# Altium PCB final_modue.PcbDoc
Units mm, origin at the board's own origin, x right, y up, seen from the top; angles counter-clockwise.
Board outline 64.39 x 68.71 mm, 3 copper layers (Top Layer, Mid-Layer 3, Bottom Layer); 23 components, 22 nets, 113 pads, 76 vias.
Unrouted connection lines stored in the file: 1.
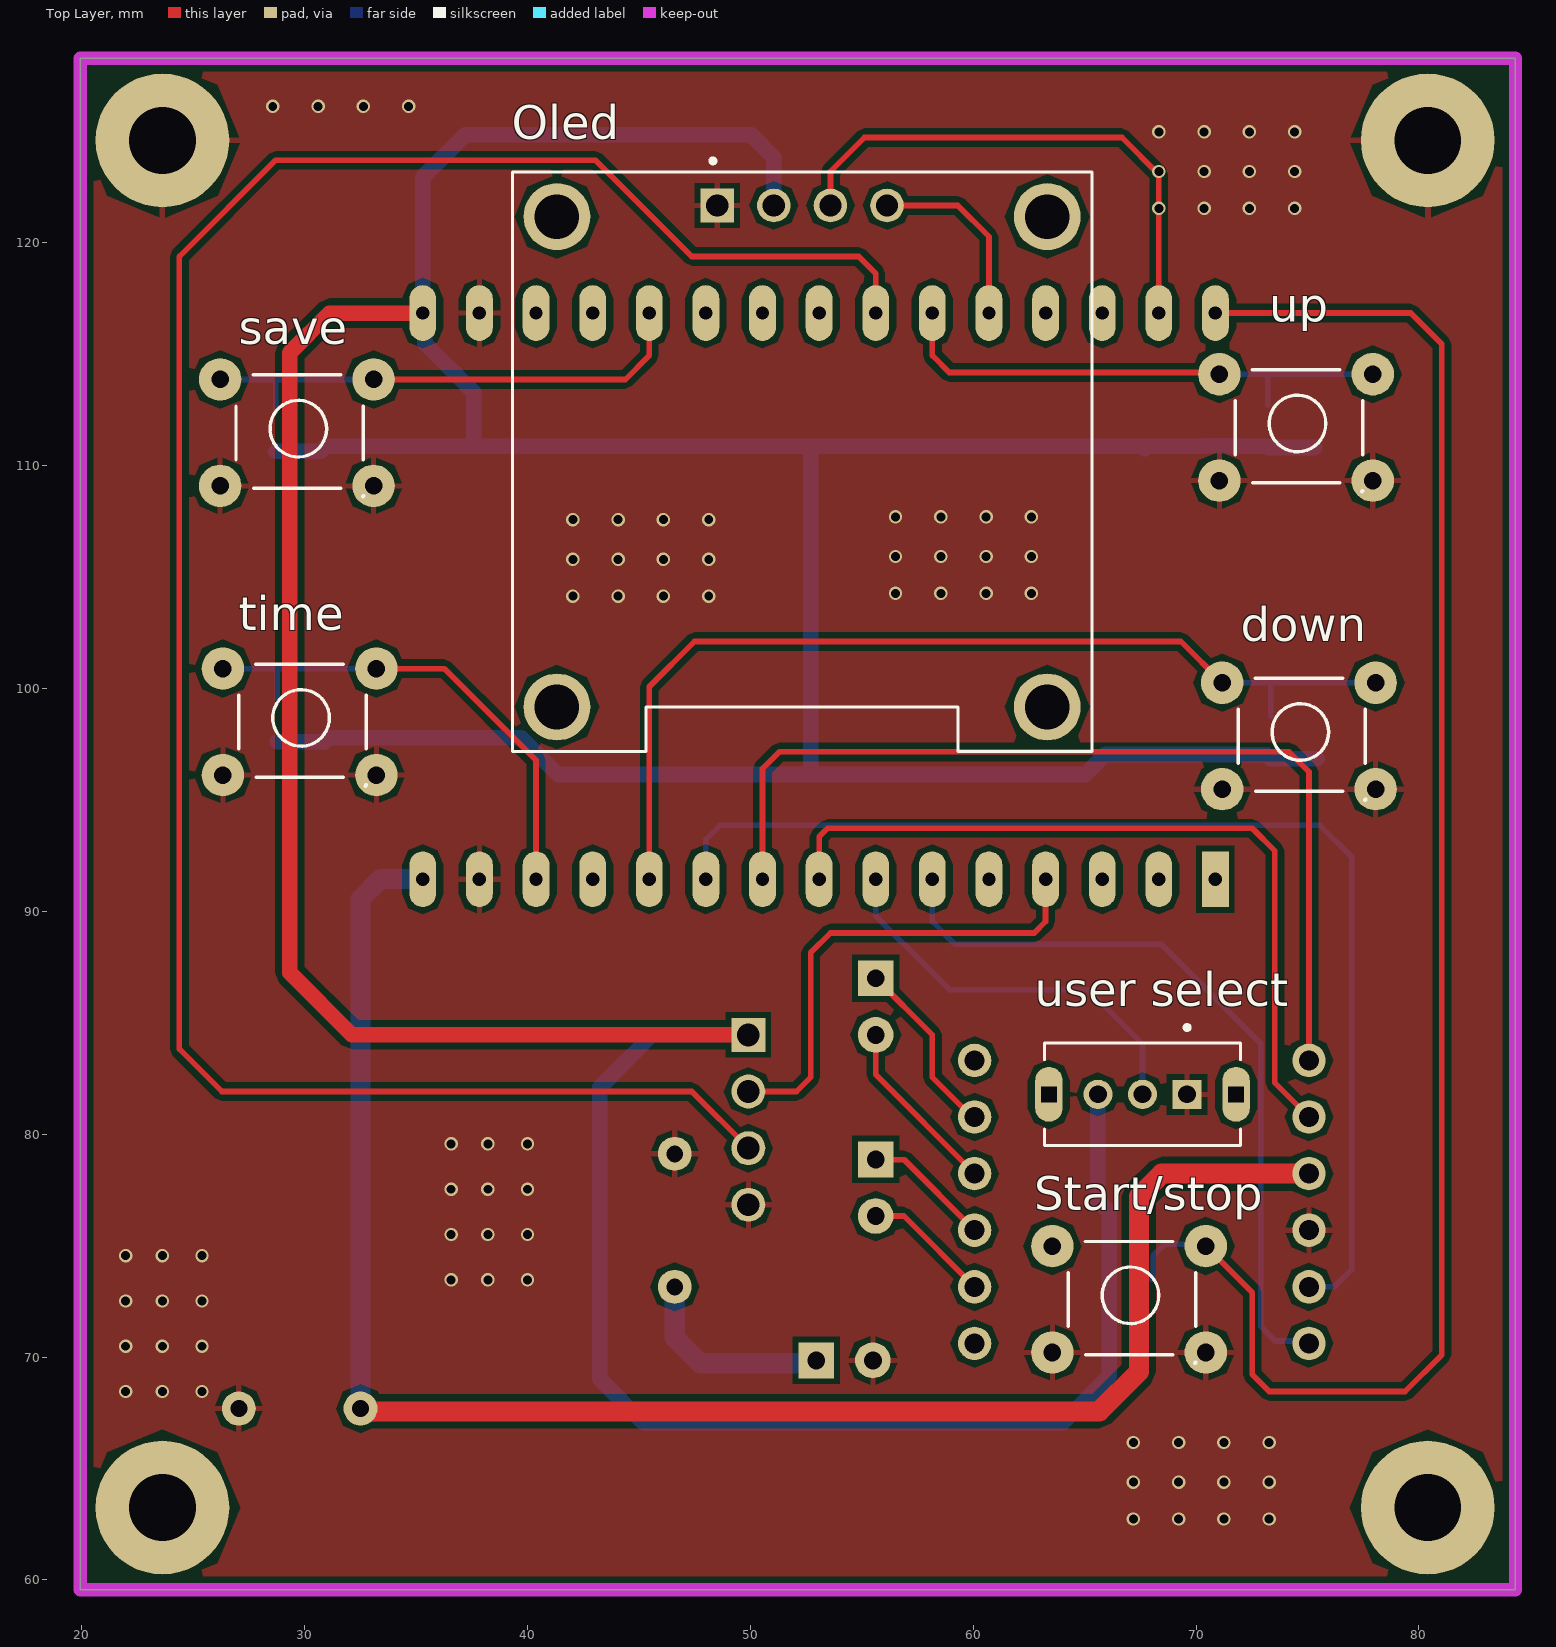
[diagram p0: Top Layer view]
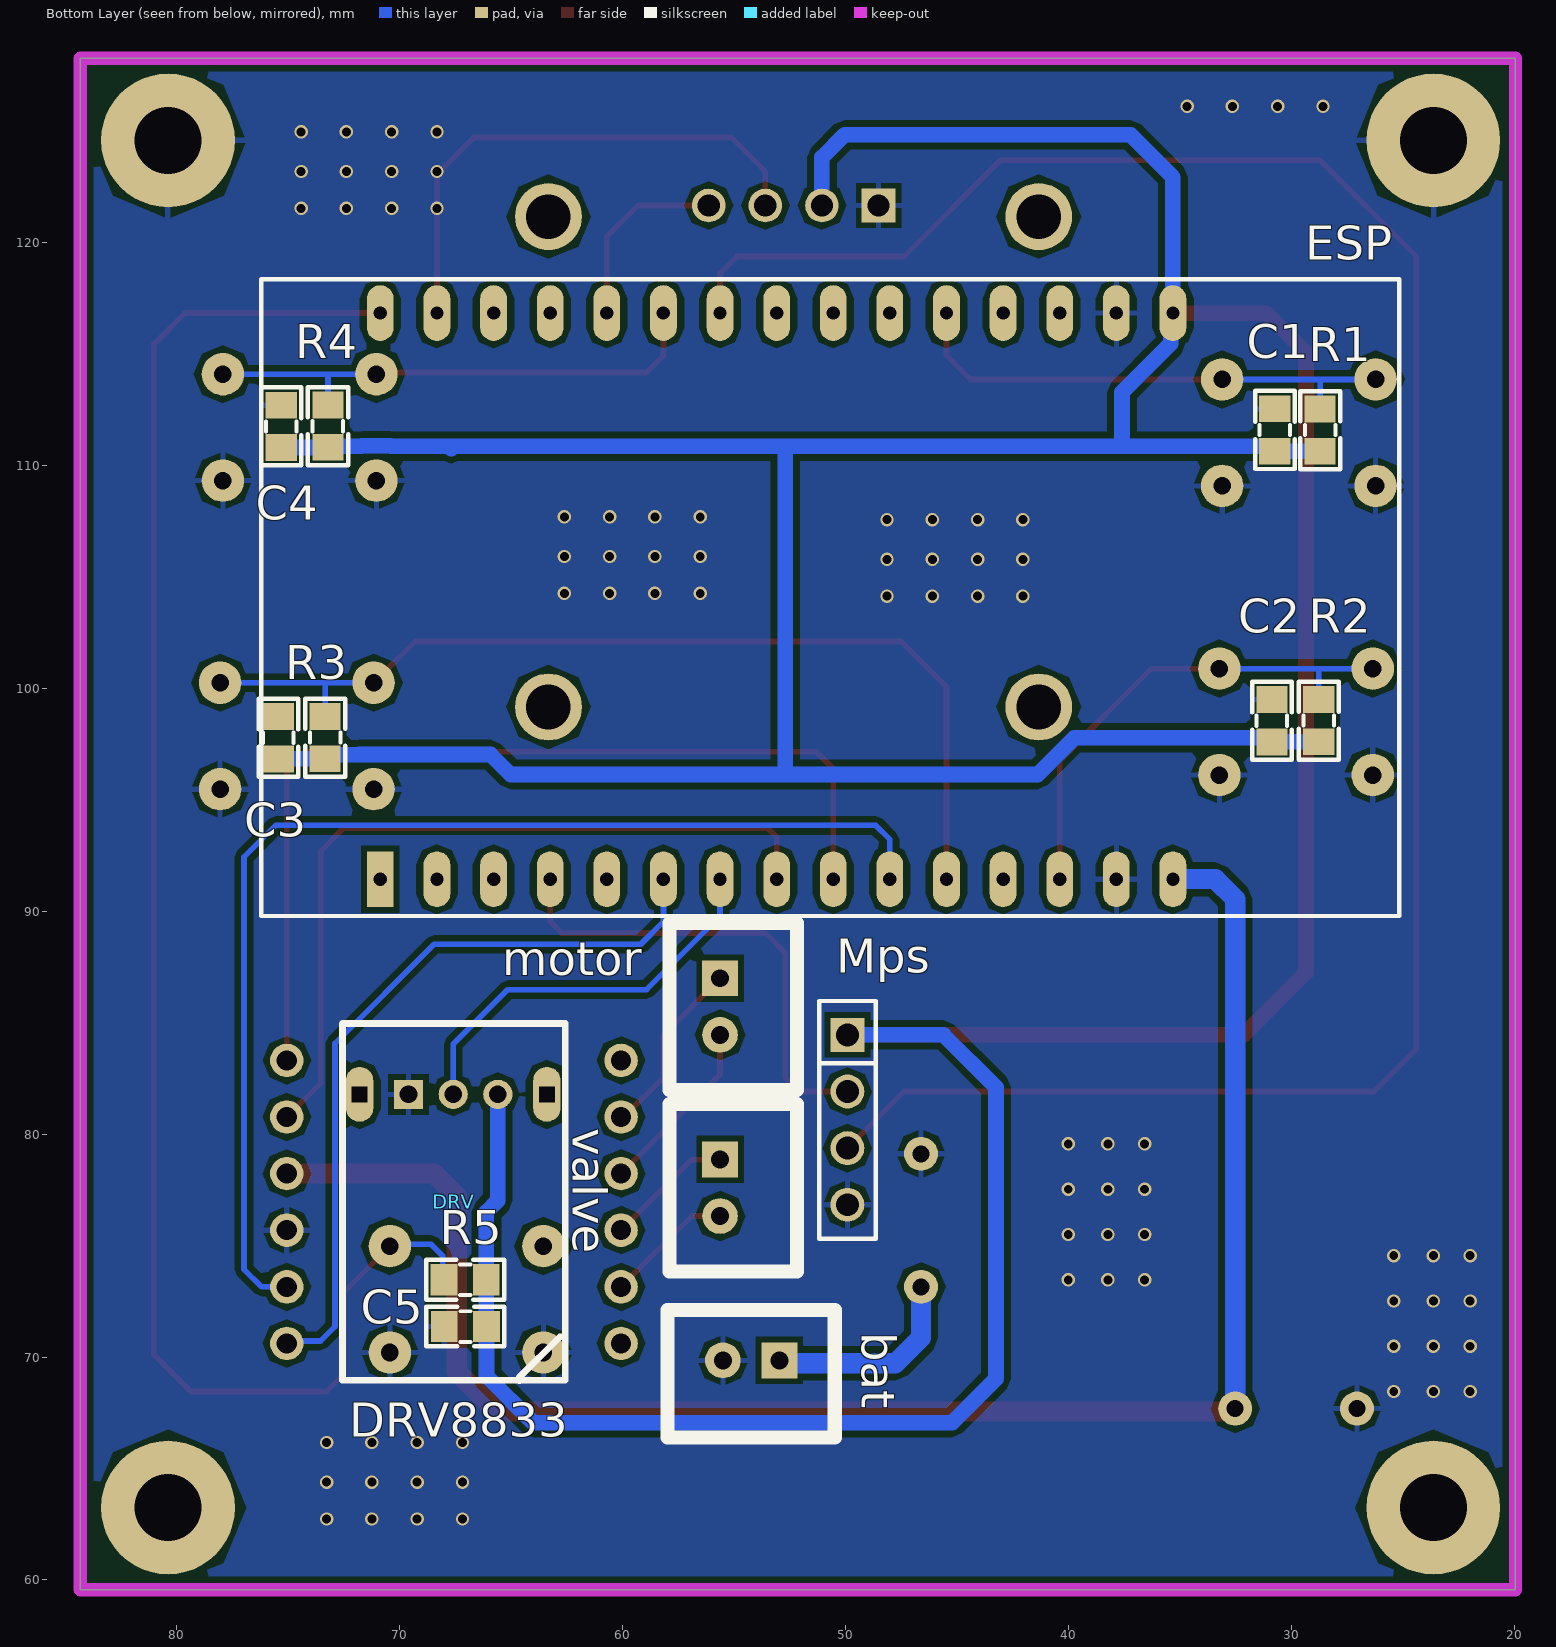
[diagram p1: Bottom Layer view, seen from below]

## Layer stack, top to bottom
Top Solder: solder mask 0.0102, Solder Resist, Dk 3.5
Top Layer: signal copper 0.0356
Dielectric 1: dielectric 0.32, FR-4, Dk 4.8
Mid-Layer 3: signal copper 0.0356
Dielectric2: dielectric 0.32, FR-4, Dk 4.8
Bottom Layer: signal copper 0.0356
Bottom Solder: solder mask 0.0102, Solder Resist, Dk 3.5

## Board outline
19.939,59.563 19.939,128.27 84.328,128.27 84.328,59.563

## Design rules (kind name [scope] priority, off if disabled: settings)
Clearance [All] p1: gap=0.254 ignorepadtopadclearanceinfootprint=FALSE except(0: Arc-Hole Track-Hole SMDPad-Hole THPad-Hole Via-Hole Fill-Hole Poly-Hole Region-Hole Text-Hole)
PolygonConnect [All] p1: connectstyle=Relief reliefconductorwidth=0.254 reliefentries=4 polygonreliefangle="90 Angle" airgapwidth=0.254
RoutingVias [All] p1: holewidth=0.711 width=1.27 viastyle="Through Hole" minholewidth=0.711 minwidth=1.27 maxholewidth=0.711 maxwidth=1.27
SolderMaskExpansion [All] p1: expansion=0.102
Width [All] p1: maxlimit=1 minlimit=0.254 preferedwidth=0.7
30 further rules are at their usual default settings.

## Components (designator, comment, footprint, x,y, rotation, side; value= is the part's Value field where it differs from the comment)
bat "Header 2P 2.54 Duc Thang" XH2.54M-2 52.959,69.85 r0 bottom (schematic designator Pin)
C1 "104" "tu 0805" 30.731,111.596 r270 bottom
C2 "104" "tu 0805" 30.861,98.552 r270 bottom
C3 "104" "tu 0805" 75.438,97.79 r270 bottom
C4 "104" "tu 0805" 75.311,111.76 r270 bottom
C5 "104" "tu 0805" 67.056,71.374 r180 bottom
down "Nut Nhan 4 Chan Cam 6x6" "Nut Nhan 4 Chan Cam 6x6" 71.501,100.457 r0 top (schematic designator BT3)
DRV "DRV8833" DRV8833 67.564,76.962 r90 bottom
ESP "ESP32 DEVKIT" "ESP32 WROOM 32 KIT" 70.866,91.44 r90 bottom
motor "motor" XH2.54M-2 55.626,86.995 r270 bottom
Mps "MPS" "JP 1x4 CT" 49.911,84.455 r270 bottom
Oled "DM-OLED096-636" MODULE_DM-OLED096-636 52.324,110.166 r0 top
R1 "10k" "tro smd 0805" 28.764,111.582 r90 bottom
R2 "10k" "tro smd 0805" 28.829,98.552 r90 bottom
R3 "10k" "tro smd 0805" 73.406,97.79 r90 bottom
R4 "10k" "tro smd 0805" 73.279,111.76 r90 bottom
R5 "10k" "tro smd 0805" 67.056,73.406 r0 bottom
save "Nut Nhan 4 Chan Cam 6x6" "Nut Nhan 4 Chan Cam 6x6" 26.544,114.066 r0 top (schematic designator BT1)
Start/stop "Nut Nhan 4 Chan Cam 6x6" "Nut Nhan 4 Chan Cam 6x6" 63.881,75.184 r0 top (schematic designator BT5)
time "Nut Nhan 4 Chan Cam 6x6" "Nut Nhan 4 Chan Cam 6x6" 26.67,101.092 r0 top (schematic designator BT2)
up "Nut Nhan 4 Chan Cam 6x6" "Nut Nhan 4 Chan Cam 6x6" 71.374,114.3 r0 top (schematic designator BT4)
"user select" "SS12D07VG4" SW_SS12D07VG4 67.596,81.788 r180 top (schematic designator button)
valve "valve" XH2.54M-2 55.626,78.867 r270 bottom

## Footprints (in the part's own frame and the unit in brackets; to place one, negate y for a bottom-side part, rotate by r counter-clockwise, add the part's x,y. Pads: shape width x height; smd on the part's side, far side on the other; paste and mask are expansions set on the pad)
DRV8833 [mm] "DRV8833"
  round 1.5 hole 0.9 mask+0.102: 1(-6.35,-7.5) 2(-3.81,-7.5) 3(-1.27,-7.5) 4(1.27,-7.5) 5(3.81,-7.5) 6(6.35,-7.5) 7(6.35,7.5) 8(3.81,7.5) 9(1.27,7.5) 10(-1.27,7.5) 11(-3.81,7.5) 12(-6.35,7.5)
  silkscreen extent -8.02,-5 8,5, body extent -7.85,-9.3 8.1,9.1, height 12.5
"ESP32 WROOM 32 KIT" [mm]
  rect 2.5x1.2 hole 0.6: 1(0,0)
  oval 2.5x1.2 hole 0.6: 2(0,-2.54) 3(0,-5.08) 4(0,-7.62) 5(0,-10.16) 6(0,-12.7) 7(0,-15.24) 8(0,-17.78) 9(0,-20.32) 10(0,-22.86) 11(0,-25.4) 12(0,-27.94) 13(0,-30.48) 14(0,-33.02) 15(0,-35.56) 16(25.4,-35.56) 17(25.4,-33.02) 18(25.4,-30.48) 19(25.4,-27.94) 20(25.4,-25.4) 21(25.4,-22.86) 22(25.4,-20.32) 23(25.4,-17.78) 24(25.4,-15.24) 25(25.4,-12.7) 26(25.4,-10.16) 27(25.4,-7.62) 28(25.4,-5.08) 29(25.4,-2.54) 30(25.4,0)
  silkscreen extent -1.65,-45.72 26.92,5.33, body extent -1.65,-45.6 26.85,5.33, height 10.49
"JP 1x4 CT" [mm]
  rect 1.52x1.52 hole 1.02: 1(0,0)
  round 1.52 hole 1.02: 2(2.54,0) 3(5.08,0) 4(7.62,0)
  silkscreen extent -1.52,-1.27 9.14,1.27, body extent -1.52,-1.25 9.14,1.25, height 8.51
MODULE_DM-OLED096-636 [mm]
  rect 1.508x1.508 / inner round 1.508 / far side rect 1.508x1.508 hole 1: 1(-3.81,11.5)
  round 1.508 hole 1: 2(-1.27,11.5) 3(1.27,11.5) 4(3.81,11.5)
  round 3 hole 2: S1(-11,11) S2(11,11) S3(11,-11) S4(-11,-11)
  silkscreen extent -13,-13 13,13.6, body extent -13,-13 13,13, height 5.66
"Nut Nhan 4 Chan Cam 6x6" [mil] "SW button 4pin, 250 x250 mil"
  round 75 hole 31: 1(-13,-8) 1(258,-8) 2(-13,-196) 2(258,-196)
  silkscreen extent 15,-215 240,0, body extent -31,-225 281,19, height 276
SW_SS12D07VG4 [mm]
  rect 1.308x1.308 / inner round 1.308 / far side rect 1.308x1.308 hole 0.8: 1(-2,0)
  round 1.308 hole 0.8: 2(0,0) 3(2,0)
  oval 1.23x2.46 hole 0.7 square: S1(-4.2,0) S2(4.2,0)
  silkscreen extent -4.4,-3.1 4.4,2.3, body extent -4.35,-2.2 4.35,2.2, height 8.7
"tro smd 0805" [mm]
  rect 1.2x1.4 smd: 1(-0.946,-0.061) 2(0.954,-0.061)
  silkscreen extent -1.75,-0.97 1.75,0.84, body extent -1.56,-0.76 1.44,0.64, height 0.53
"tu 0805" [mm] "Compoment SMD 80x50mil"
  rect 1.2x1.4 smd: 1(-0.946,-0.003) 2(0.954,-0.003)
  silkscreen extent -1.75,-0.89 1.75,0.89, body extent -1.01,-0.64 1.01,0.63, height 0.61
XH2.54M-2 [mm]
  rect 1.6x1.6 hole 0.8: 1(0,0)
  round 1.6 hole 0.8: 2(2.54,0)
  silkscreen extent -2.48,-2.26 5.02,3.46, body extent -2.48,-2.26 5.02,3.48, height 6.91

## Part data
bat: "C?m", Chung_Loai=C?m, Don_Vi=Con, Ma_Hang=MH001283, Ten_Linh_Kien="Header 2P XH2.54-2P Ð?c Th?ng"
C1 C2 C3 C4 C5: library part "Tu 0805 104 50V 10%", "Dán", Chung_Loai=Dán, Don_Vi=Con, Ma_Hang=MH004551, So_Chan=2, Ten_Linh_Kien="T? 0805 104-100nF 10% 50V"
down save Start/stop time up: "Nut Nhan 4 Chan 6x6mm", Ma_Hang=MH004584, Ten="Nút Nh?n 4 Chân 6x6x5MM DIP"
ESP: library part "ESP32 WROOM 32 KIT"
motor valve: library part "Header 2P 2.54 Duc Thang", "C?m", Chung_Loai=C?m, Don_Vi=Con, Ma_Hang=MH001283, Ten_Linh_Kien="Header 2P XH2.54-2P Ð?c Th?ng"
Mps: library part "JP 1x4 2.54 Cai Thang", "C?m", Chung_Loai=C?m, Don_Vi=Con, Ma_Hang=MH004006, Ten_Linh_Kien="Jump Ðon Cái 2.54MM 1x20P Th?ng"
Oled: "0.96” 128 X 64 MONOCHROME GRAPHIC OLED DISPLAY MODULE - I2C", Package=Package, Check_prices=https://www.snapeda.com/parts/DM-OLED096-636/Display+Module/view-part/?ref=eda, MF="Display Module", MP=DM-OLED096-636, SnapEDA_Link=https://www.snapeda.com/parts/DM-OLED096-636/Display+Module/view-part/?ref=snap
R1 R2 R3 R4 R5: library part "Tro 0805 1% 10k", "Dán", Chung_Loai=Dán, Don_Vi=Con, Ma_Hang=MH005473, So_Chan=2, Ten_Linh_Kien="Tr? 0805 1% 10k"
"user select": "Switch Slide ON ON SPDT Top Slide 0.3A 30VDC PC Pins Bracket Mount/Through Hole Automotive Bulk", Package=Package, Check_prices=https://www.snapeda.com/parts/SS12D07VG4/Shouhan/view-part/?ref=eda, MF=Shouhan, MP=SS12D07VG4, SnapEDA_Link=https://www.snapeda.com/parts/SS12D07VG4/Shouhan/view-part/?ref=snap

## Free pads (board coordinates)
  round 1.524 hole 0.762: 10(27.051,67.691) 11(32.512,67.691) 12(46.609,73.152) ""(46.609,79.121)
  round 6 hole 3: 13(23.622,63.246) 13(23.622,124.587) 14(80.391,63.246) 14(80.391,124.587)

## Via types
v1: diameter 0.6, hole 0.4, Top Layer to Bottom Layer, tented both sides, 76 vias

## Nets (pads, with @x,y where several pads share a name; then routed paths per layer and width w, separated by ;. In a path a pad name is that pad's centre, name@x,y a point inside that pad or via, vN(x,y) a via of type N, cw(c..) or ccw(c..) an arc to the next point about the centre after c; other vN are vias at no path point)
3v3: "user select.3" C1.2 C2.2 C3.2 C4.2 C5.2 ESP.16 Mps.1 Oled.2 R1.1 R2.1 R3.1 R4.1 R5.1 | length 256
  Top Layer w0.7: ESP.16 31.115,116.84 29.337,115.062 29.337,87.249 32.131,84.455 Mps.1
  Bottom Layer w0.7: R1.1 C1.2@30.735,110.637 ; R2.1 28.773,97.602 30.86,97.602 C2.2 31.057,97.79 39.724,97.79 41.375,96.139 52.705,96.139 ; C1.2 30.964,110.871 37.592,110.871 ; Mps.1 45.593,84.455 43.243,82.105 43.243,69.025 45.212,67.056 64.008,67.056 66.102,69.15 C5.2 66.106,71.375 66.106,76.515 65.596,77.025 65.596,81.788 ; Oled.2 51.054,123.825 50.038,124.841 37.211,124.841 35.306,122.936 ESP.16 35.402,116.744 35.402,115.474 37.592,113.284 37.592,110.871 ; 67.691,110.744 67.818,110.871 ; C4.2 75.31,110.81 73.223,110.81 R4.1 73.162,110.871 71.696,110.871 71.689,110.878 70.399,110.878 70.392,110.871 67.818,110.871 ; C3.2 75.437,96.84 73.35,96.84 R3.1 73.162,97.028 71.823,97.028 71.816,97.035 65.92,97.035 65.024,96.139 52.705,96.139 ; 37.592,110.871 52.705,110.871 ; 52.705,96.139 52.705,110.871 ; 52.705,110.871 67.818,110.871
+5: bat.1 pad.12 | length 9.2
  Bottom Layer w0.9: pad.12 46.609,70.866 47.752,69.723 52.832,69.723 bat.1
G4: ESP.20 R1.2 save.1 | length 22.8
  Top Layer w0.254: save.1@33.097,113.863 44.394,113.863 45.466,114.935 ESP.20
  Bottom Layer w0.254: save.1@26.214,113.863 28.829,113.863 save.1@33.097,113.863 ; R1.2 28.703,113.736
G13: ESP.13 R2.2 time.1 | length 22.5
  Top Layer w0.254: time.1@33.223,100.889 36.271,100.889 40.386,96.774 ESP.13
  Bottom Layer w0.254: time.1@26.34,100.889 28.829,100.889 ; R2.2 28.768,100.828 28.829,100.889 ; time.1@33.223,100.889 28.829,100.889
G14: down.1 ESP.11 R3.2 | length 44.4
  Top Layer w0.254: ESP.11 45.466,100.076 47.498,102.108 69.317,102.108 down.1@71.171,100.254
  Bottom Layer w0.254: down.1@71.171,100.254 73.279,100.254 ; R3.2 73.345,100.188 73.279,100.254 ; down.1@78.054,100.254 73.279,100.254
G18: ESP.24 Mps.3 | length 99.8
  Top Layer w0.254: Mps.3 47.371,81.915 26.289,81.915 24.384,83.82 24.384,119.38 28.702,123.698 43.053,123.698 47.371,119.38 54.864,119.38 55.626,118.618 ESP.24
G19: ESP.25 R4.2 up.1 | length 23.4
  Top Layer w0.254: ESP.25 58.166,114.935 58.928,114.173 70.968,114.173 up.1@71.044,114.097
  Bottom Layer w0.254: up.1@71.044,114.097 73.279,114.097 ; R4.2 73.218,114.036 73.279,114.097 ; up.1@77.927,114.097 73.279,114.097
G21: ESP.26 Oled.4 | length 8.6
  Top Layer w0.254: Oled.4 59.309,121.666 60.706,120.269 ESP.26
G22: ESP.29 Oled.3 | length 23.8
  Top Layer w0.254: Oled.3 53.594,123.19 55.118,124.714 66.675,124.714 68.326,123.063 ESP.29
G23: ESP.30 R5.2 Start/stop.1 | length 75.9
  Top Layer w0.254: Start/stop.1@70.434,74.981 72.517,72.898 72.517,69.215 73.279,68.453 79.375,68.453 81.026,70.104 81.026,115.443 79.629,116.84 ESP.30
  Bottom Layer w0.254: R5.2 68.072,73.528 68.072,74.549 68.58,75.057 70.358,75.057 Start/stop.1@70.434,74.981
G25: DRV.8 ESP.8 | length 35.5
  Top Layer w0.254: ESP.8 53.086,93.345 53.467,93.726 72.517,93.726 73.533,92.71 73.533,82.303 DRV.8
G26: DRV.7 ESP.9 | length 43.1
  Top Layer w0.254: ESP.9 50.546,96.393 51.308,97.155 74.168,97.155 75.064,96.259 DRV.7
G27: DRV.11 ESP.10 | length 52.3
  Bottom Layer w0.254: ESP.10 48.006,93.218 48.641,93.853 75.565,93.853 76.984,92.434 76.984,73.936 76.2,73.152 DRV.11
G32: DRV.12 ESP.6 | length 34.1
  Bottom Layer w0.254: ESP.6 58.166,89.535 59.182,88.519 68.453,88.519 72.898,84.074 72.898,71.374 73.552,70.72 74.956,70.72 DRV.12
G33: "user select.2" ESP.7 | length 18.3
  Bottom Layer w0.254: ESP.7 55.626,89.789 58.928,86.487 65.151,86.487 67.596,84.042 67.596,81.788
G34: ESP.4 Mps.2 | length 21.7
  Top Layer w0.254: Mps.2 52.07,81.915 52.705,82.55 52.705,88.138 53.594,89.027 62.738,89.027 63.246,89.535 ESP.4
GND: "user select.1" bat.2 C1.1 C2.1 C3.1 C4.1 C5.1 down.2 DRV.10 ESP.14 ESP.17 Mps.4 Oled.1 pad. pad.10 pad.13@23.622,124.587 pad.14@80.391,124.587 save.2 Start/stop.2 time.2 up.2
  other v1: 67.183,62.738 69.215,62.738 71.247,62.738 73.279,62.738 67.183,64.389 69.215,64.389 71.247,64.389 73.279,64.389 67.183,66.167 69.215,66.167 71.247,66.167 73.279,66.167 21.971,68.453 23.622,68.453 25.4,68.453 21.971,70.485 23.622,70.485 25.4,70.485 21.971,72.517 23.622,72.517 25.4,72.517 36.576,73.467 38.227,73.467 40.005,73.467 21.971,74.549 23.622,74.549 25.4,74.549 36.576,75.499 38.227,75.499 40.005,75.499 36.576,77.531 38.227,77.531 40.005,77.531 36.576,79.563 38.227,79.563 40.005,79.563 42.037,104.14 44.069,104.14 46.101,104.14 48.133,104.14 56.515,104.267 58.547,104.267 60.579,104.267 62.611,104.267 42.037,105.791 44.069,105.791 46.101,105.791 48.133,105.791 56.515,105.918 58.547,105.918 60.579,105.918 62.611,105.918 42.037,107.569 44.069,107.569 46.101,107.569 48.133,107.569 56.515,107.696 58.547,107.696 60.579,107.696 62.611,107.696 68.326,121.539 70.358,121.539 72.39,121.539 74.422,121.539 68.326,123.19 70.358,123.19 72.39,123.19 74.422,123.19 68.326,124.968 70.358,124.968 72.39,124.968 74.422,124.968 28.575,126.111 30.607,126.111 32.639,126.111 34.671,126.111
NetDRV_2: DRV.2 valve.2 | length 5.8
  Top Layer w0.254: valve.2 56.889,76.327 DRV.2
NetDRV_3: DRV.3 valve.1 | length 5.8
  Top Layer w0.254: valve.1 55.642,78.851 56.905,78.851 DRV.3
NetDRV_4: DRV.4 motor.2 | length 8.1
  Top Layer w0.254: motor.2 55.626,82.677 60.064,78.239 DRV.4
NetDRV_5: DRV.5 motor.1 | length 8.1
  Top Layer w0.254: motor.1 58.166,84.455 58.166,82.55 59.944,80.772 DRV.5
VCC: DRV.9 ESP.15 pad.11 | length 77.7
  Top Layer w0.9: pad.11 32.631,67.572 33.073,67.572 33.08,67.564 65.659,67.564 67.437,69.342 67.437,77.216 68.453,78.232 DRV.9
  Bottom Layer w0.9: pad.11 32.512,90.551 33.401,91.44 ESP.15
pads on no net: "user select.S1" "user select.S2" DRV.1 DRV.6 ESP.1 ESP.2 ESP.3 ESP.5 ESP.12 ESP.18 ESP.19 ESP.21 ESP.22 ESP.23 ESP.27 ESP.28 Oled.S1 Oled.S2 Oled.S3 Oled.S4

## Polygon pours and split planes (outlines as drawn)
GND on Bottom Layer "GND_L03_P000" (solid, pour order 0): 20.066,128.27 84.074,128.27 84.455,59.563 19.939,59.817
GND on Top Layer "GND_L01_P001" (solid, pour order 1): 19.939,128.27 84.455,128.016 84.455,59.563 19.939,59.563

## Keep-outs
Keep-Out Layer:
  the board outline again, w0.6